# EAGLE board Board (EAGLE 9.7.0)
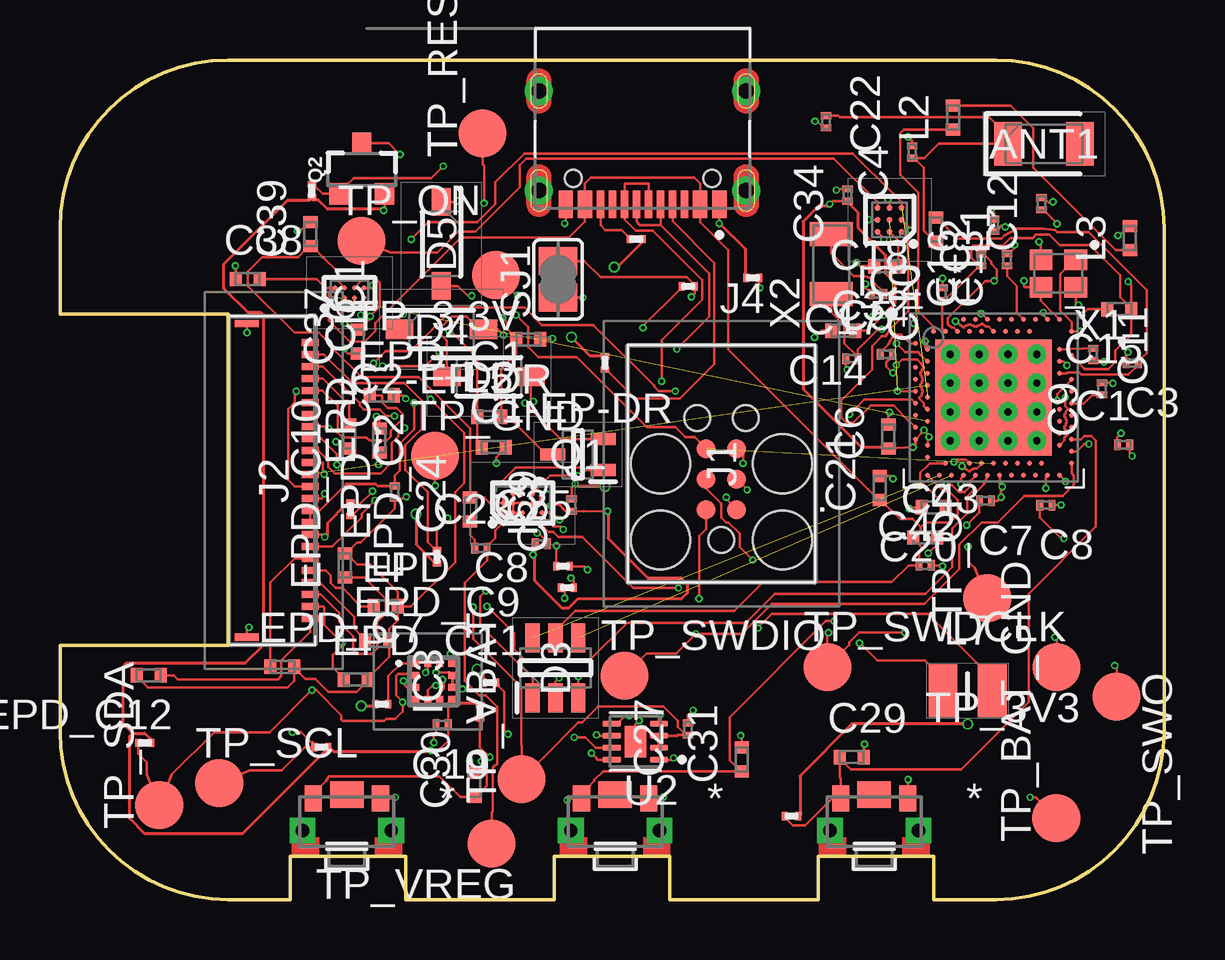
[diagram p0: board, top side]
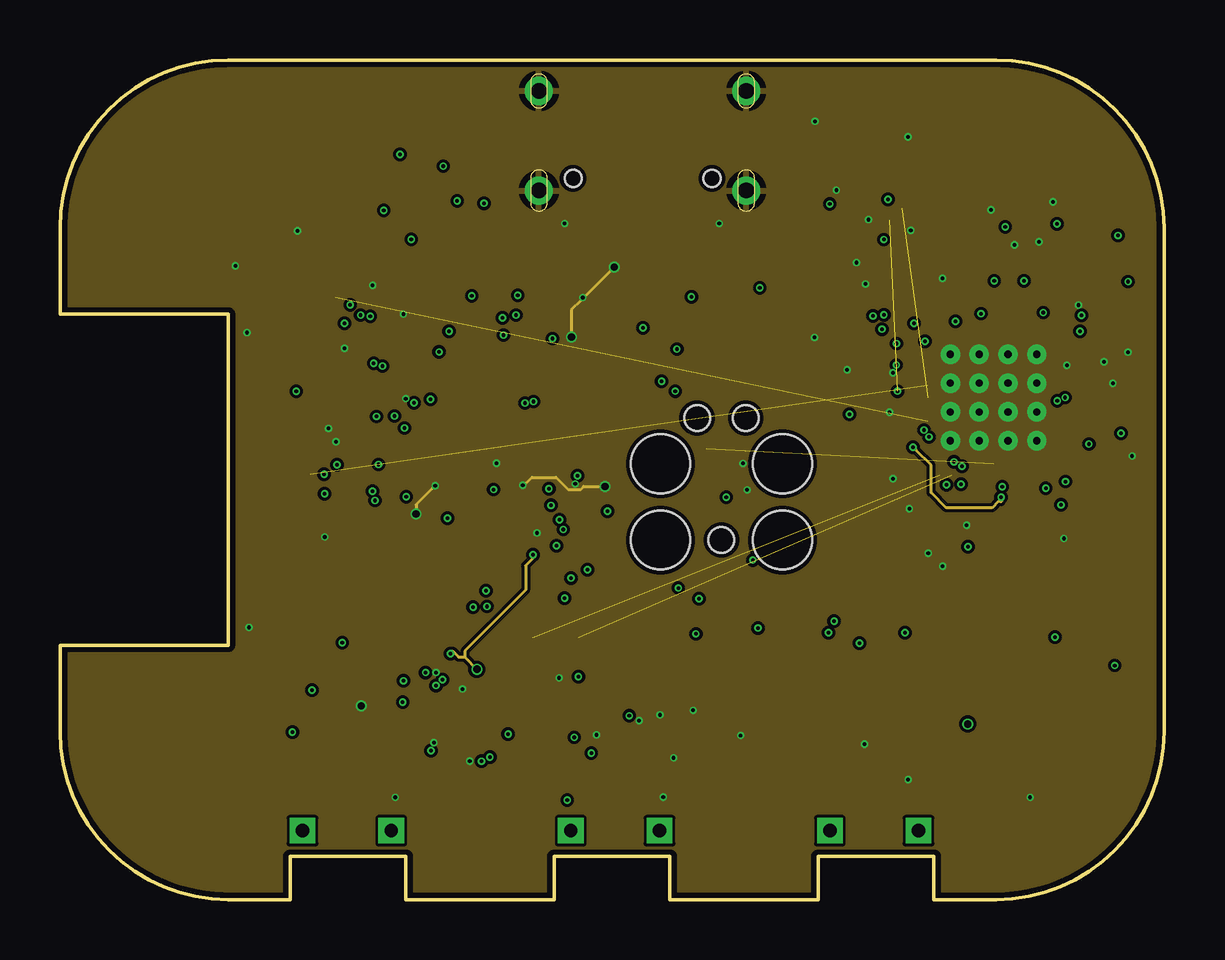
[diagram p1: board, inner layer Route2]
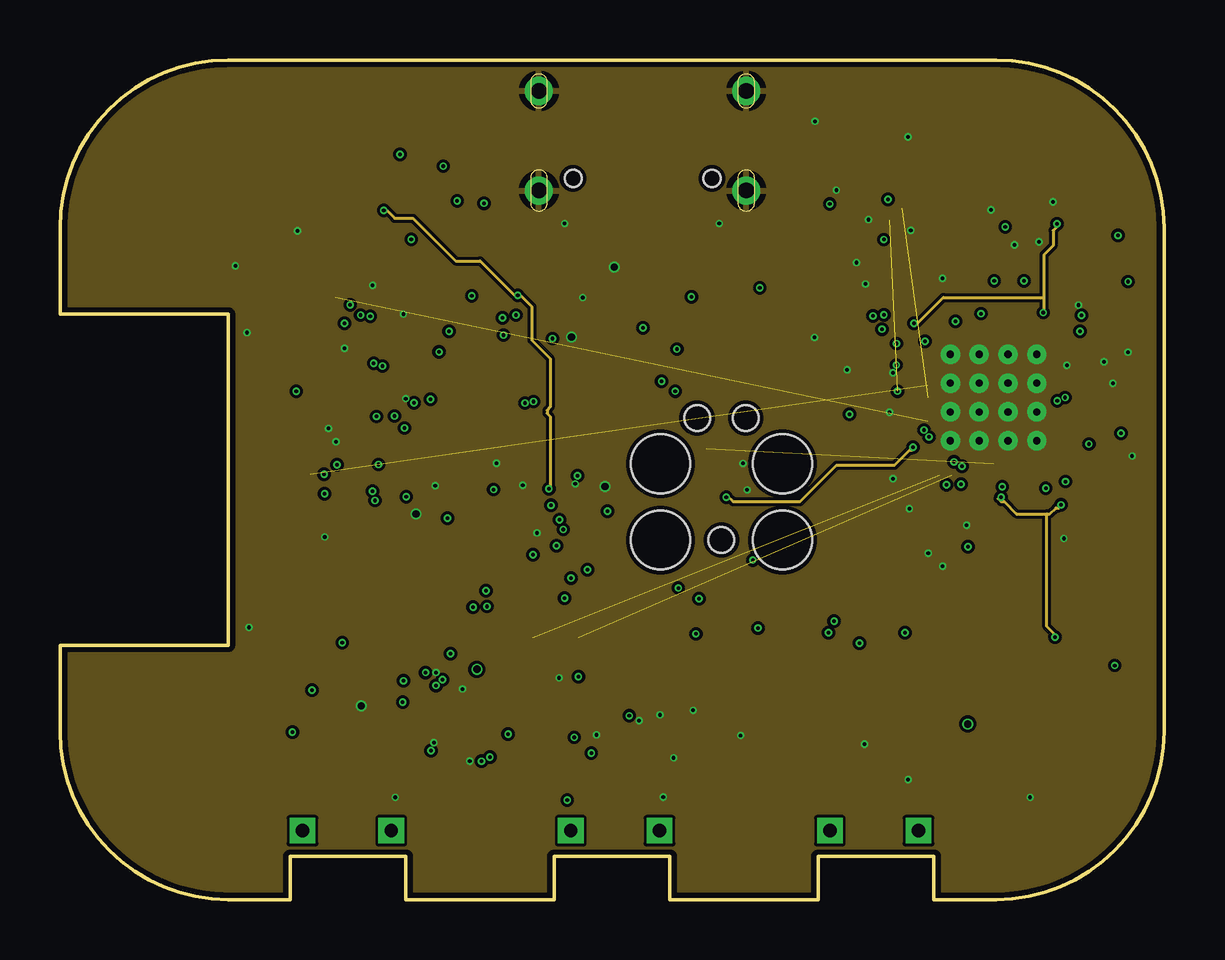
[diagram p2: board, inner layer Route15]
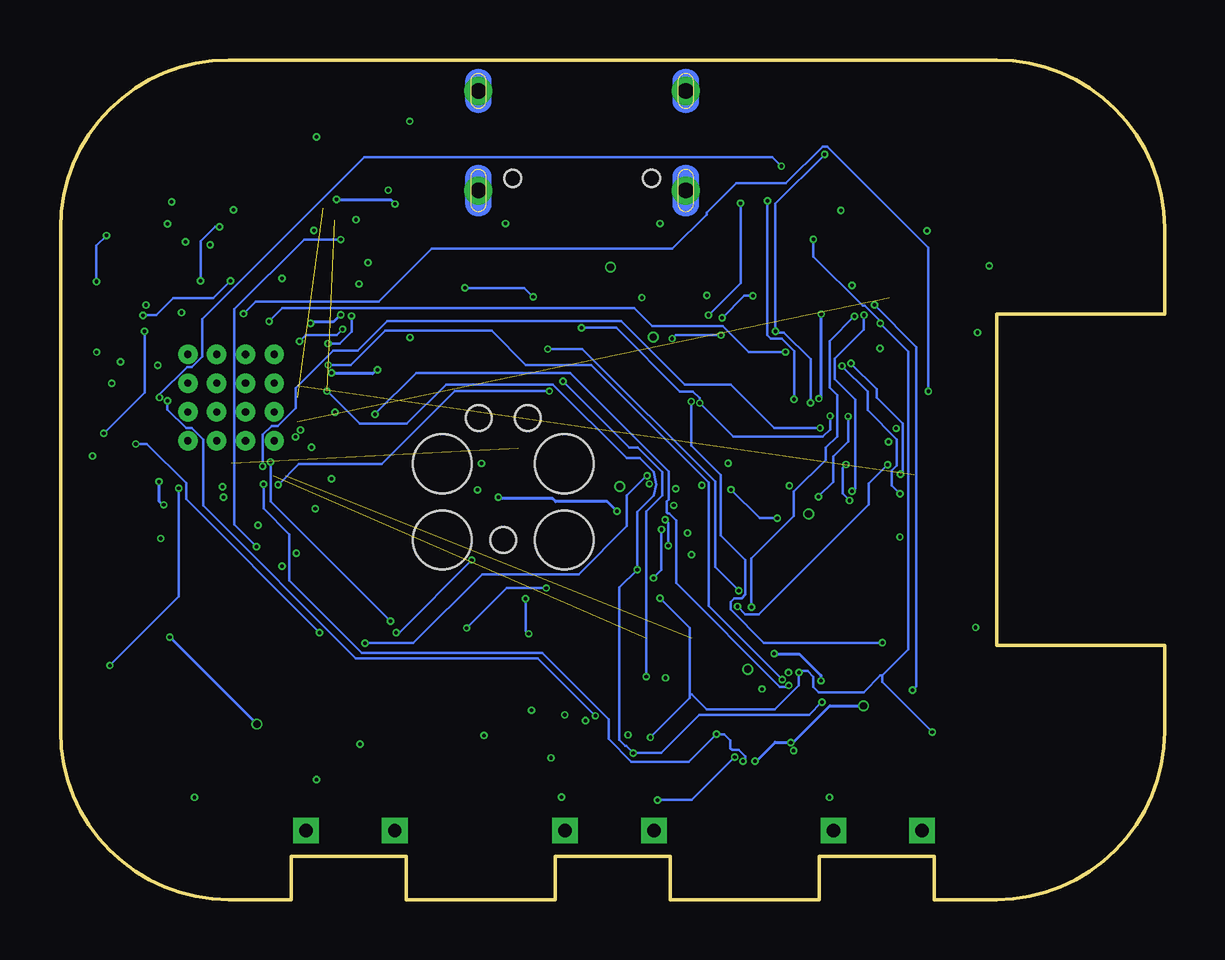
[diagram p3: board, bottom side, seen from below]

Size 46 x 35 mm. Coordinates in mm from the lower left corner, seen from the top.
Outline: 0,28 0,24.4 7,24.4 7,10.6 0,10.6 0,7 arc90 7,0 9.6,0 9.6,1.8 14.4,1.8 14.4,0 20.6,0 20.6,1.8 25.4,1.8 25.4,0 31.6,0 31.6,1.8 36.4,1.8 36.4,0 39,0 arc90 46,7 46,28 arc90 39,35 7,35 arc90 0,28
Copper layers (1+2*15+16): Top 0.035mm / dielectric 1.6mm / Route2 0.035mm / dielectric 0.15mm / Route15 0.035mm / dielectric 0.2mm / Bottom 0.035mm
Design rules "jlcpcb-2layers.dru *": minimum track width 5mil, minimum drill 0.2mm, track to track 5mil, track to pad 5mil, pad to pad 5mil, via to via 5mil, smd to smd 5mil, copper to edge 0.2mm, drill to drill 6mil, minimum pad ring 10mil, minimum via ring 3mil, stop-mask expansion 4mil, vias tented up to drill 999mm, thermal gap 10mil

## Footprints (pad centres in the part's own frame; a part is rotated, then mirrored left to right if it is on the bottom)
2450AT18B100E_ANTC3216X140N = smd 1.15 x 1.8: 1 -1.5,0; 2 1.5,0
NORDIC_NRF_3_RESC0201_L = smd 0.28 x 0.43: 1 -0.255,0; 2 0.255,0
NORDIC_NRF_3_RESC0402_L = smd 0.5 x 0.6: 1 -0.5,0; 2 0.5,0
ESP32_C6_LIBRARY_5_SOD3716X135N = smd 1.15 x 0.8: 1 -1.75,0; 2 1.75,0
ESP32_C6_LIBRARY_3_SOT95P280X145-6N = smd 1.2 x 0.6: 1 -1.25,0.95; 2 -1.25,0; 3 -1.25,-0.95; 4 1.25,-0.95; 5 1.25,0; 6 1.25,0.95
BQ25180YBGR_BGA8C40P2X4_100X155X50 = smd 0.2 x 0.2: A1 -0.2,0.6; A2 0.2,0.6; B1 -0.2,0.2; B2 0.2,0.2; C1 -0.2,-0.2; C2 0.2,-0.2; D1 -0.2,-0.6; D2 0.2,-0.6
DRV2605YZFR_BGA9C50P3X3_144X144X62 = smd 0.25 x 0.25: A1 -0.5,0.5; A2 0,0.5; A3 0.5,0.5; B1 -0.5,0; B2 0,0; B3 0.5,0; C1 -0.5,-0.5; C2 0,-0.5; C3 0.5,-0.5
BMA423_BMA423 = smd 0.3 x 0.35: 1 -0.75,-0.775; 2 -0.25,-0.775; 3 0.25,-0.775; 4 0.75,-0.775; 7 0.75,0.775; 8 0.25,0.775; 9 -0.25,0.775; 10 -0.75,0.775 | smd 0.35 x 0.3: 5 0.775,-0.25; 6 0.775,0.25; 11 -0.775,0.25; 12 -0.775,-0.25
RT6160AWSC_BGA15C40P3X5_140X230X60 = smd 0.216 x 0.216: A1 -0.4,0.8; A2 0,0.8; A3 0.4,0.8; B1 -0.4,0.4; B2 0,0.4; B3 0.4,0.4; C1 -0.4,0; C2 0,0; C3 0.4,0; D1 -0.4,-0.4; D2 0,-0.4; D3 0.4,-0.4; E1 -0.4,-0.8; E2 0,-0.8; E3 0.4,-0.8
TC2030-IDC_TC2030IDC = smd 0.783 x 0.783: 1 -0.953,-0.635; 2 -0.953,0.635; 3 0.317,-0.635; 4 0.317,0.635; 5 1.588,-0.635; 6 1.588,0.635 | hole 2.451: -2.223,-2.54; -2.223,2.54; 0.952,-2.54; 0.952,2.54 | hole 1.067: -2.223,0; 2.857,-1.016; 2.857,1.016
503480-2400_5034802400 = smd 0.3 x 0.7: 1 -5.75,1.525; 2 -5.25,1.525; 3 -4.75,1.525; 4 -4.25,1.525; 5 -3.75,1.525; 6 -3.25,1.525; 7 -2.75,1.525; 8 -2.25,1.525; 9 -1.75,1.525; 10 -1.25,1.525; 11 -0.75,1.525; 12 -0.25,1.525; 13 0.25,1.525; 14 0.75,1.525; 15 1.25,1.525; 16 1.75,1.525; 17 2.25,1.525; 18 2.75,1.525; 19 3.25,1.525; 20 3.75,1.525; 21 4.25,1.525; 22 4.75,1.525; 23 5.25,1.525; 24 5.75,1.525 | smd 0.3 x 1: MP1 -6.54,-1.125; MP2 6.54,-1.125
KH-TYPE-C-16P_KINGHELM_KH-TYPE-C-16P = smd 0.6 x 1.15: A1_B12 -3.2,4.725; A4_B9 -2.4,4.725; A9_B4 2.4,4.725; A12_B1 3.2,4.725 | smd 0.3 x 1.15: A5 -1.25,4.725; A6 -0.25,4.725; A7 0.25,4.725; A8 1.25,4.725; B5 1.75,4.725; B6 0.75,4.725; B7 -0.75,4.725; B8 -1.75,4.725 | drill 0.65 pad 1.05: SH1 -4.32,0; SH2 4.32,0; SH3 -4.32,4.15; SH4 4.32,4.15 | hole 0.7: -2.89,3.65; 2.89,3.65
NORDIC_NRF_2_RESC0402_L = smd 0.5 x 0.6: 1 -0.5,0; 2 0.5,0
MLP2016SR47MT0S1_INDC2016X100N = smd 1.2 x 2.2: 1 -1.028,0; 2 1.028,0
ESP32_C6_LIBRARY_6_SOT65P210X110-3N = smd 1.05 x 0.5: 1 -1.05,0.65; 2 -1.05,-0.65; 3 1.05,0
ESP32_C6_LIBRARY_4_ESP32_C6_LIBRARY_4_ESP32_C6_LIBRARY_4_ESP32_C6_LIBRARY_4_ESP32_WROVER_SPARKFUN-DISCRETESEMI_SOT23-3 = smd 0.8 x 0.9: 1 -0.95,-1; 2 0.95,-1; 3 0,1.1
CPF0201D7K68C1_0201 = smd 0.35 x 0.25: 1 0,0.275; 2 0,-0.275
ESP32_C6_LIBRARY_7_JUMPER_SJ = smd 1.168 x 1.6: 1 -0.762,0; 2 0.762,0
2025-10-22_07-23-44_LIBRARY_SW_EVP-AKE31A_PAN = smd 0.711 x 1.092: 1 -1.4,-0.972; 2 1.4,-0.972 | drill 0.559 pad 0.914 square: 3 -1.848,0.381; 4 1.848,0.381 | smd 1.397 x 1.092: 5 0,-1.124
HECTOR_WATCH_1_TP20R = smd 2 x 2: TP 0,0
NORDIC_NRF_4_AQFN50P700X700X85_HS-74N = smd 4.85 x 4.85: P$74 0,0 | drill 0.3 pad 0.6: P$75 -1.8,1.8; P$76 -0.6,1.8; P$77 0.6,1.8; P$78 1.8,1.8; P$79 -1.8,0.6; P$80 -0.6,0.6; P$81 0.6,0.6; P$82 1.8,0.6; P$83 -1.8,-0.6; P$84 -0.6,-0.6; P$85 0.6,-0.6; P$86 1.8,-0.6; P$87 -1.8,-1.8; P$88 -0.6,-1.8; P$89 0.6,-1.8; P$90 1.8,-1.8 | smd 0.2 x 0.2: P$A8 -1.25,3.25; P$A10 -0.75,3.25; P$A12 -0.25,3.25; P$A14 0.25,3.25; P$A16 0.75,3.25; P$A18 1.25,3.25; P$A20 1.75,3.25; P$A22 2.25,3.25; P$A23 2.75,3.25; P$AA24 3.25,-2.25; P$AB2 -2.75,-2.5; P$AC5 -2,-2.75; P$AC9 -1,-2.75; P$AC11 -0.5,-2.75; P$AC13 0,-2.75; P$AC15 0.5,-2.75; P$AC17 1,-2.75; P$AC19 1.5,-2.75; P$AC21 2,-2.75; P$AC24 3.25,-2.75; P$AD2 -2.75,-3.25; P$AD4 -2.25,-3.25; P$AD6 -1.75,-3.25; P$AD8 -1.25,-3.25; P$AD10 -0.75,-3.25; P$AD12 -0.25,-3.25; P$AD14 0.25,-3.25; P$AD16 0.75,-3.25; P$AD18 1.25,-3.25; P$AD20 1.75,-3.25; P$AD22 2.25,-3.25; P$AD23 2.75,-3.25; P$B1 -3.25,2.75; P$B3 -2.5,2.75; P$B5 -2,2.75; P$B7 -1.5,2.75; P$B9 -1,2.75; P$B11 -0.5,2.75; P$B13 0,2.75; P$B15 0.5,2.75; P$B17 1,2.75; P$B19 1.5,2.75; P$B24 3.25,2.75; P$C1 -3.25,2.25; P$D2 -2.75,2; P$D23 2.75,2; P$E24 3.25,1.75; P$F2 -2.75,1.5; P$F23 2.75,1.5; P$G1 -3.25,1.25; P$H2 -2.75,1; P$H23 2.75,1; P$J1 -3.25,0.75; P$J24 3.25,0.75; P$K2 -2.75,0.5; P$L1 -3.25,0.25; P$L24 3.25,0.25; P$M2 -2.75,0; P$N1 -3.25,-0.25; P$N24 3.25,-0.25; P$P2 -2.75,-0.5; P$P23 2.75,-0.5; P$R1 -3.25,-0.75; P$R24 3.25,-0.75; P$T2 -2.75,-1; P$T23 2.75,-1; P$U1 -3.25,-1.25; P$U24 3.25,-1.25; P$V23 2.75,-1.5; P$W1 -3.25,-1.75; P$W24 3.25,-1.75; P$Y2 -2.75,-2; P$Y23 2.75,-2
ESP32_C6_LIBRARY_SON50P200X200X80-9N = smd 0.76 x 0.27: 1 -0.985,0.75; 2 -0.985,0.25; 3 -0.985,-0.25; 4 -0.985,-0.75; 5 0.985,-0.75; 6 0.985,-0.25; 7 0.985,0.25; 8 0.985,0.75 | smd 0.9 x 1.3: 9 0,0
NORDIC_NRF_BT-XTAL_2016_N = smd 0.95 x 0.85: 1 -0.725,-0.575; 2 0.725,-0.575; 3 0.725,0.575; 4 -0.725,0.575
NORDIC_NRF_1_XTAL_3215_N = smd 1 x 1.8: 1 -1.25,0; 2 1.25,0

## Placement (x,y rotation side)
ANT1  2450AT18B100E  [2450AT18B100E_ANTC3216X140N]  41,31.5 0 top
C1  12pF  [NORDIC_NRF_3_RESC0201_L]  44.31,18.96 0 top
C1-EP-DR  10uF  [NORDIC_NRF_3_RESC0402_L]  18.07,18.86 0 top
C2  12pF  [NORDIC_NRF_3_RESC0201_L]  38.92,28.11 90 top
C2-EP-DR  4.7uF/25V  [NORDIC_NRF_3_RESC0402_L]  19.51,23.35 180 top
C3  1pF  [NORDIC_NRF_3_RESC0201_L]  44.67,22.37 180 top
C4  1pF  [NORDIC_NRF_3_RESC0201_L]  35.51,31.16 90 top
C5  100nF  [NORDIC_NRF_3_RESC0201_L]  34.43,22.73 0 top
C6  4.7uF  [NORDIC_NRF_3_RESC0402_L]  34.52,19.31 90 top
C7  100nF  [NORDIC_NRF_3_RESC0201_L]  38.56,16.62 180 top
C8  100nF  [NORDIC_NRF_3_RESC0201_L]  41.08,16.44 180 top
C9  820pF  [NORDIC_NRF_3_RESC0201_L]  43.41,21.29 90 top
C10  N.C.  [NORDIC_NRF_3_RESC0201_L]  36.77,25.24 90 top
C11  100pF  [NORDIC_NRF_3_RESC0201_L]  43.06,22.73 270 top
C12  100nF  [NORDIC_NRF_3_RESC0201_L]  40.9,29.01 90 top
C13  N.C.  [NORDIC_NRF_3_RESC0201_L]  39.46,26.68 90 top
C14  4.7uF  [NORDIC_NRF_3_RESC0402_L]  32.63,23.71 180 top
C15  1.0uF  [NORDIC_NRF_3_RESC0402_L]  44.13,24.61 180 top
C16  47nF  [NORDIC_NRF_3_RESC0201_L]  38.38,26.68 90 top
C17  12pF  [NORDIC_NRF_3_RESC0201_L]  32.99,22.55 0 top
C18  12pF  [NORDIC_NRF_3_RESC0201_L]  34.07,25.24 0 top
C19  100nF  [NORDIC_NRF_3_RESC0201_L]  15.92,7.29 180 top
C20  4.7uF  [NORDIC_NRF_3_RESC0402_L]  36.4,16.35 180 top
C21  4.7uF  [NORDIC_NRF_3_RESC0402_L]  34.16,17.16 90 top
C22  N.C.  [NORDIC_NRF_3_RESC0201_L]  31.91,32.42 270 top
C23  0.1uF  [NORDIC_NRF_3_RESC0201_L]  17.54,14.65 0 top
C24  10uF  [NORDIC_NRF_3_RESC0402_L]  17.09,16.26 90 top
C25  22uF  [NORDIC_NRF_3_RESC0201_L]  20.06,14.83 0 top
C27  0.1uF  [NORDIC_NRF_3_RESC0201_L]  26.16,7.11 90 top
C29  1uF  [NORDIC_NRF_3_RESC0402_L]  32.99,5.94 0 top
C30  1uF  [NORDIC_NRF_3_RESC0402_L]  17.27,4.77 90 top
C31  1uF  [NORDIC_NRF_3_RESC0402_L]  28.41,5.85 90 top
C32  1uF  [NORDIC_NRF_3_RESC0402_L]  34.43,26.4 180 top
C33  22uF  [NORDIC_NRF_3_RESC0201_L]  21.31,16.44 90 top
C34  0.1uF  [NORDIC_NRF_3_RESC0201_L]  32.81,29.37 90 top
C37  1uF  [NORDIC_NRF_3_RESC0402_L]  12.41,23.26 90 top
C38  1uF  [NORDIC_NRF_3_RESC0402_L]  7.83,25.86 0 top
C39  10uF  [NORDIC_NRF_3_RESC0402_L]  10.44,27.75 90 top
C42  0.1uF  [NORDIC_NRF_3_RESC0201_L]  36.05,13.93 0 top
C43  4.7uF  [NORDIC_NRF_3_RESC0402_L]  36.04,15.09 0 top
D2  MBR0530  [ESP32_C6_LIBRARY_5_SOD3716X135N]  17.87,21.8 0 top
D3  USBLC6-2SC6Y  [ESP32_C6_LIBRARY_3_SOT95P280X145-6N]  20.64,9.66 90 top
D4  MBR0530  [ESP32_C6_LIBRARY_5_SOD3716X135N]  15.89,23.77 0 top
D5  MBR0530  [ESP32_C6_LIBRARY_5_SOD3716X135N]  15.89,27.33 270 top
EPD_C1  1uF/50V  [NORDIC_NRF_3_RESC0402_L]  13.4,21.02 0 top
EPD_C2  1uF/50V  [NORDIC_NRF_3_RESC0402_L]  12.05,19.31 270 top
EPD_C5  0.1uF/50V  [NORDIC_NRF_3_RESC0201_L]  13.95,16.98 90 top
EPD_C6  1uF/50V  [NORDIC_NRF_3_RESC0402_L]  13.31,19.13 90 top
EPD_C7  1uF/50V  [NORDIC_NRF_3_RESC0402_L]  9.27,9.71 0 top
EPD_C8  1uF/50V  [NORDIC_NRF_3_RESC0402_L]  13.58,12.22 0 top
EPD_C9  1uF/50V  [NORDIC_NRF_3_RESC0402_L]  13.22,10.79 0 top
EPD_C10  1uF/50V  [NORDIC_NRF_3_RESC0402_L]  11.87,13.93 90 top
EPD_C11  1uF/50V  [NORDIC_NRF_3_RESC0402_L]  12.32,9.17 0 top
EPD_C12  1uF/50V  [NORDIC_NRF_3_RESC0402_L]  3.7,9.35 180 top
IC1  BQ25180YBGR  [BQ25180YBGR_BGA8C40P2X4_100X155X50]  12.06,25.29 90 top
IC2  DRV2605YZFR  [DRV2605YZFR_BGA9C50P3X3_144X144X62]  34.57,28.33 180 top
IC3  BMA421  [BMA423_BMA423]  15.57,9.1 270 top
IC9  RT6160AWSC  [RT6160AWSC_BGA15C40P3X5_140X230X60]  19.28,16.53 90 top
J1  TC2030-IDC  [TC2030-IDC_TC2030IDC]  27.56,17.21 90 top
J2  503480-2400  [503480-2400_5034802400]  8.9,17.47 270 top
J4  KH-TYPE-C-16P  [KH-TYPE-C-16P_KINGHELM_KH-TYPE-C-16P]  24.27,33.71 180 top
L1  3.9nH  [NORDIC_NRF_2_RESC0402_L]  36.49,27.93 270 top
L2  10uH  [NORDIC_NRF_2_RESC0402_L]  37.21,32.6 90 top
L3  15nH  [NORDIC_NRF_2_RESC0402_L]  44.58,27.57 90 top
L5  68uH  [NORDIC_NRF_2_RESC0402_L]  17.89,20.12 0 top
L7  FTC252012SR47MBCA  [MLP2016SR47MT0S1_INDC2016X100N]  37.82,8.71 180 top
Q1  SI1308EDL-T1-GE3  [ESP32_C6_LIBRARY_6_SOT65P210X110-3N]  21.58,18.56 180 top
Q2  20V/4.2A/52mΩ/1.4W  [ESP32_C6_LIBRARY_4_ESP32_C6_LIBRARY_4_ESP32_C6_LIBRARY_4_ESP32_C6_LIBRARY_4_ESP32_WROVER_SPARKFUN-DISCRETESEMI_SOT23-3]  12.57,30.42 0 top
R1  0  [CPF0201D7K68C1_0201]  13.41,8.15 90 top
R1_EP_DR  0.47  [CPF0201D7K68C1_0201]  26.17,25.56 270 top
R1_USB  5K1  [CPF0201D7K68C1_0201]  22.71,22.38 0 top
R2  0  [CPF0201D7K68C1_0201]  20.96,13.89 270 top
R2_EP_DR  10K  [CPF0201D7K68C1_0201]  15.7,14.29 180 top
R2_USB  5K1  [CPF0201D7K68C1_0201]  24.01,27.53 90 top
R4  0  [CPF0201D7K68C1_0201]  21.14,12.99 90 top
R5  10K  [CPF0201D7K68C1_0201]  17.91,9.04 270 top
R7  10K  [CPF0201D7K68C1_0201]  30.48,3.48 90 top
R8  10K  [CPF0201D7K68C1_0201]  17.5,7.83 180 top
R9  10K  [CPF0201D7K68C1_0201]  12.11,16.27 0 top
R17  3K3  [CPF0201D7K68C1_0201]  10.9,6.35 270 top
R18  3K3  [CPF0201D7K68C1_0201]  3.53,6.53 270 top
R_PWR_EPD  10K  [CPF0201D7K68C1_0201]  10.49,29.55 0 top
R_TYPE_SEL  2.2  [CPF0201D7K68C1_0201]  28.86,25.92 90 top
SJ1  [ESP32_C6_LIBRARY_7_JUMPER_SJ]  20.75,25.85 90 top
SW1  2025-10-22_07-23-44_LIBRARY_EVP-AKE31ASW_EVP-AKE31A_PAN  [2025-10-22_07-23-44_LIBRARY_SW_EVP-AKE31A_PAN]  11.95,3.25 180 top
SW2  2025-10-22_07-23-44_LIBRARY_EVP-AKE31ASW_EVP-AKE31A_PAN  [2025-10-22_07-23-44_LIBRARY_SW_EVP-AKE31A_PAN]  23.13,3.25 180 top
SW3  2025-10-22_07-23-44_LIBRARY_EVP-AKE31ASW_EVP-AKE31A_PAN  [2025-10-22_07-23-44_LIBRARY_SW_EVP-AKE31A_PAN]  33.92,3.25 180 top
TP_3.3V  HECTOR_WATCH_1_TPTP20R  [HECTOR_WATCH_1_TP20R]  18.17,26.03 180 top
TP_3V3  HECTOR_WATCH_1_TPTP20R  [HECTOR_WATCH_1_TP20R]  41.53,9.7 180 top
TP_BAT_GND  HECTOR_WATCH_1_TPTP20R  [HECTOR_WATCH_1_TP20R]  41.51,3.4 90 top
TP_GND  HECTOR_WATCH_1_TPTP20R  [HECTOR_WATCH_1_TP20R]  15.62,18.49 0 top
TP_ON  HECTOR_WATCH_1_TPTP20R  [HECTOR_WATCH_1_TP20R]  12.57,27.47 0 top
TP_OP  HECTOR_WATCH_1_TPTP20R  [HECTOR_WATCH_1_TP20R]  38.64,12.55 90 top
TP_RESET  HECTOR_WATCH_1_TPTP20R  [HECTOR_WATCH_1_TP20R]  17.61,31.94 90 top
TP_SCL  HECTOR_WATCH_1_TPTP20R  [HECTOR_WATCH_1_TP20R]  6.64,4.85 0 top
TP_SDA  HECTOR_WATCH_1_TPTP20R  [HECTOR_WATCH_1_TP20R]  4.14,3.94 90 top
TP_SWDCLK  HECTOR_WATCH_1_TPTP20R  [HECTOR_WATCH_1_TP20R]  31.97,9.7 0 top
TP_SWDIO  HECTOR_WATCH_1_TPTP20R  [HECTOR_WATCH_1_TP20R]  23.53,9.34 0 top
TP_SWO  HECTOR_WATCH_1_TPTP20R  [HECTOR_WATCH_1_TP20R]  44.03,8.45 270 top
TP_VBAT  HECTOR_WATCH_1_TPTP20R  [HECTOR_WATCH_1_TP20R]  19.23,5.01 90 top
TP_VREG  HECTOR_WATCH_1_TPTP20R  [HECTOR_WATCH_1_TP20R]  17.99,2.34 180 top
U1  NRF52840 _QF  [NORDIC_NRF_4_AQFN50P700X700X85_HS-74N]  38.9,20.93 0 top
U2  MAX17048G+T10  [ESP32_C6_LIBRARY_SON50P200X200X80-9N]  23.97,6.58 180 top
X1  32MHz  [NORDIC_NRF_BT-XTAL_2016_N]  41.6,26.1 180 top
X2  32.768kHz  [NORDIC_NRF_1_XTAL_3215_N]  32.13,26.49 90 top

## Library data of the parts
ANT1 = InkTime_v5; ARROW_PART_NUMBER: 2450AT18B100E; ARROW_PRICE-STOCK: https://www.arrow.com/en/products/2450at18b100e/johanson-dielectrics?utm_currency=USD&region=nac; DESCRIPTION: Antennas 2.45GHz ANTENNA; HEIGHT: 1.4mm; MANUFACTURER_NAME: JOHANSON TECHNOLOGY; MANUFACTURER_PART_NUMBER: 2450AT18B100E; MOUSER_PART_NUMBER: 609-2450AT18B100E; MOUSER_PRICE-STOCK: https://www.mouser.co.uk/ProductDetail/Johanson-Technology/2450AT18B100E?qs=yCnrNFeXz%252Bh5MFsFIXGZGA%3D%3D
C1 C1-EP-DR C2 C2-EP-DR C3-C25 C27 C29-C34 C37-C39 C42 C43 EPD_C1 EPD_C2 EPD_C5-EPD_C12 L1-L3 L5 R1 R1_EP_DR R1_USB R2 R2_EP_DR R2_USB R4 R5 R7-R9 R17 R18 R_PWR_EPD R_TYPE_SEL SJ1 TP_3.3V TP_3V3 TP_BAT_GND TP_GND TP_ON TP_OP TP_RESET TP_SCL TP_SDA TP_SWDCLK TP_SWDIO TP_SWO TP_VBAT TP_VREG U1 X1 X2 = InkTime_v5
D2 D4 D5 = InkTime_v5; AVAILABILITY: In Stock; CHECK_PRICES: https://www.snapeda.com/parts/MBR0530/Onsemi/view-part/?ref=eda; DESCRIPTION: Diode Schottky 30 V 500mA Surface Mount SOD-123; MF: ON Semiconductor; MP: MBR0530; PACKAGE: SOD-123-2 ON Semiconductor; PRICE: None; PURCHASE-URL: https://www.snapeda.com/api/url_track_click_mouser/?unipart_id=179458&manufacturer=ON Semiconductor&part_name=MBR0530&search_term=None; SNAPEDA_LINK: https://www.snapeda.com/parts/MBR0530/Onsemi/view-part/?ref=snap
D3 = InkTime_v5; AVAILABILITY: In Stock; CHECK_PRICES: https://www.snapeda.com/parts/USBLC6-2SC6Y/STMicroelectronics/view-part/?ref=eda; DESCRIPTION: 17V Clamp 5A (8/20µs) Ipp Tvs Diode Surface Mount SOT-23-6; MF: STMicroelectronics; MP: USBLC6-2SC6Y; PACKAGE: SOT-23-6 STMicroelectronics; PRICE: None; SNAPEDA_LINK: https://www.snapeda.com/parts/USBLC6-2SC6Y/STMicroelectronics/view-part/?ref=snap
IC1 = InkTime_v5; ARROW_PART_NUMBER: BQ25180YBGR; ARROW_PRICE-STOCK: https://www.arrow.com/en/products/bq25180ybgr/texas-instruments?utm_currency=USD&region=nac; DESCRIPTION: Charger IC Lithium Ion/Polymer, Lithium Iron Phosphate 8-DSBGA (1.6x1.1); HEIGHT: 0.5mm; MANUFACTURER_NAME: Texas Instruments; MANUFACTURER_PART_NUMBER: BQ25180YBGR; MOUSER_PART_NUMBER: 595-BQ25180YBGR; MOUSER_PRICE-STOCK: https://www.mouser.co.uk/ProductDetail/Texas-Instruments/BQ25180YBGR?qs=doiCPypUmgEWjAK%252BJAX6Tw%3D%3D
IC2 = InkTime_v5; ARROW_PART_NUMBER: DRV2605YZFR; ARROW_PRICE-STOCK: https://www.arrow.com/en/products/drv2605yzfr/texas-instruments?region=nac; DESCRIPTION: Haptic Driver for ERM/LRA with Built-In Library and Smart Loop Architecture; HEIGHT: 0.625mm; MANUFACTURER_NAME: Texas Instruments; MANUFACTURER_PART_NUMBER: DRV2605YZFR
IC3 = InkTime_v5; ARROW_PART_NUMBER: BMA423; ARROW_PRICE-STOCK: https://www.arrow.com/en/products/bma423/bosch; DESCRIPTION: Accelerometers Triaxial low-g 12bit Acceleration Sensor; HEIGHT: 1mm; MANUFACTURER_NAME: BOSCH; MANUFACTURER_PART_NUMBER: BMA423; MOUSER_PART_NUMBER: 262-BMA423; MOUSER_PRICE-STOCK: https://www.mouser.co.uk/ProductDetail/Bosch-Sensortec/BMA423?qs=HXFqYaX1Q2xC%252BSgeGoX3mg%3D%3D
IC9 = InkTime_v5; DESCRIPTION: Buck-Boost Regulator Positive Output Step-Up/Step-Down I2C DC-DC Controller IC 15-WL-CSP (BSC) (1.4x2.3); HEIGHT: 0.6mm; MANUFACTURER_NAME: RICHTEK; MANUFACTURER_PART_NUMBER: RT6160AWSC; MOUSER_PART_NUMBER: 835-RT6160AWSC; MOUSER_PRICE-STOCK: https://www.mouser.co.uk/ProductDetail/Richtek/RT6160AWSC?qs=amGC7iS6iy%2FLd9PSoixZXQ%3D%3D
J1 = InkTime_v5; DESCRIPTION: CABLE ADAPTER 6 POS; HEIGHT: 19mm; MANUFACTURER_NAME: Tag Connect; MANUFACTURER_PART_NUMBER: TC2030-IDC
J2 = InkTime_v5; DESCRIPTION: FFC & FPC Connectors 0.5mm FPC RA SMT Dual Contact 24Ckt; HEIGHT: 1.87mm; MANUFACTURER_NAME: Molex; MANUFACTURER_PART_NUMBER: 503480-2400; MOUSER_PART_NUMBER: 538-503480-2400; MOUSER_PRICE-STOCK: https://www.mouser.co.uk/ProductDetail/Molex/503480-2400?qs=OAhjpuo3Vu7efIoxFh9AOw%3D%3D
J4 = InkTime_v5; AVAILABILITY: Not in stock; CHECK_PRICES: https://www.snapeda.com/parts/KH-TYPE-C-16P/Kinghelm/view-part/?ref=eda; MF: kinghelm; MP: KH-TYPE-C-16P; PACKAGE: None; PRICE: None; SNAPEDA_LINK: https://www.snapeda.com/parts/KH-TYPE-C-16P/Kinghelm/view-part/?ref=snap
L7 = InkTime_v5; DESCRIPTION: SMD / SMT Inductors (Coils), L=0.47?H, L x W x T :; HEIGHT: 1mm; JLCPCB: https://jlcpcb.com/partdetail/6763488-FTC252012SR47MBCA/C5832368; MANUFACTURER_NAME: TDK; MANUFACTURER_PART_NUMBER: FTC252012SR47MBCA
Q1 = InkTime_v5; AVAILABILITY: In Stock; CHECK_PRICES: https://www.snapeda.com/parts/SI1308EDL-T1-GE3/Vishay+Siliconix/view-part/?ref=eda; DESCRIPTION: Si1308EDL-T1-GE3 N-channel MOSFET Transistor, 1.5 A, 30 V, 3-Pin SC-70 | Siliconix / Vishay SI1308EDL-T1-GE3; MF: Vishay Siliconix; MP: SI1308EDL-T1-GE3; PACKAGE: SOT-323 Vishay Semiconductor; PRICE: None; PURCHASE-URL: https://www.snapeda.com/api/url_track_click_mouser/?unipart_id=274603&manufacturer=Vishay Siliconix&part_name=SI1308EDL-T1-GE3&search_term=None; SNAPEDA_LINK: https://www.snapeda.com/parts/SI1308EDL-T1-GE3/Vishay+Siliconix/view-part/?ref=snap
Q2 = InkTime_v5; PROD_ID: TRAN-14388
SW1-SW3 = InkTime_v5; COPYRIGHT: Copyright (C) 2025 Ultra Librarian. All rights reserved.; DIGI-KEY_PART_NUMBER_1: P123437TR-ND; DIGI-KEY_PART_NUMBER_2: P123437CT-ND; DIGI-KEY_PART_NUMBER_3: P123437DKR-ND; MANUFACTURER_NAME: Panasonic; MANUFACTURER_PART_NUMBER: EVP-AKE31A
U2 = InkTime_v5; AVAILABILITY: In Stock; CHECK_PRICES: https://www.snapeda.com/parts/MAX17048G+T10/Analog+Devices/view-part/?ref=eda; DESCRIPTION: 3µA 1-Cell/2-Cell Fuel Gauge with ModelGauge; MF: Analog Devices; MP: MAX17048G+T10; PACKAGE: TDFN-8 Maxim; PRICE: None; PURCHASE-URL: https://www.snapeda.com/api/url_track_click_mouser/?unipart_id=329239&manufacturer=Analog Devices&part_name=MAX17048G+T10&search_term=None; SNAPEDA_LINK: https://www.snapeda.com/parts/MAX17048G+T10/Analog+Devices/view-part/?ref=snap

## Nets
3V3: C6.1 C7.1 C8.1 C12.1 C14.1 C19.1 C25.1 C33.1 C34.1 IC2.C2 IC3.3 IC3.7 IC3.10 IC9.E2 IC9.E3 J1.1 Q2.2 R5.2 R7.2 R8.2 R17.1 R18.1 R_PWR_EPD.2 TP_3.3V.TP TP_3V3.TP U1.P$A22 U1.P$AD14 U1.P$AD23 U1.P$B1 U1.P$W1 U1.P$Y2
ALERT: U1.P$J24 U2.5
D+: D3.4 U1.P$AD6
D-: D3.6 U1.P$AD4
DN: D3.1 J4.A7 J4.B7
DP: D3.3 J4.A6 J4.B6
EPD_3V3: C1-EP-DR.1 EPD_C5.2 J2.15 J2.16 L5.1 Q2.3
EPD_BUSY: J2.9 U1.P$AD12
EPD_CS: J2.12 U1.P$K2
EPD_DC: J2.11 U1.P$AD10
EPD_RST: J2.10 U1.P$AC11
GDR: J2.2 Q1.1 R2_EP_DR.2
GND: C1-EP-DR.2 C1.2 C2.2 C3.2 C4.2 C5.2 C6.2 C7.2 C8.2 C9.2 C10.2 C11.2 C12.2 C13.2 C14.2 C17.1 C18.1 C19.2 C20.2 C21.2 C22.2 C25.2 C27.2 C29.2 C30.2 C31.2 C32.2 C33.2 C34.2 C37.1 C38.1 C39.2 C42.2 C43.2 D3.2 D4.1 EPD_C1.2 EPD_C2.2 IC1.D2 IC2.B1 IC2.B3 IC3.8 IC3.9 IC9.C3 J1.3 J1.5 J2.8 J2.17 J2.MP1 J2.MP2 J4.A1_B12 J4.A12_B1 J4.SH1 J4.SH2 J4.SH3 J4.SH4 R1.1 R1_USB.1 R2_EP_DR.1 R2_USB.2 R9.1 R_TYPE_SEL.1 SJ1.1 SW1.1 SW2.1 SW3.1 TP_BAT_GND.TP TP_GND.TP U1.P$74 U1.P$75 U1.P$76 U1.P$77 U1.P$78 U1.P$79 U1.P$80 U1.P$81 U1.P$82 U1.P$83 U1.P$84 U1.P$85 U1.P$86 U1.P$87 U1.P$88 U1.P$89 U1.P$90 U1.P$F23 U2.1 U2.4 U2.6 U2.9 X1.2 X1.4
HAPTIC_EN: IC2.A1 U1.P$U1
IMU_INT1: IC3.5 U1.P$N1
IMU_INT2: IC3.6 U1.P$P2
LX1: IC9.B1 IC9.B2 IC9.B3 IC9.C1 IC9.C2 L7.1
LX2: IC9.D2 IC9.D3 L7.2
MOSI: J2.14 U1.P$B13
N$1: ANT1.1 C4.1 C22.1 L1.2
N$2: C9.1 U1.P$N24
N$3: C23.1 C24.1
N$4: C3.1 L1.1 U1.P$H23
N$5: IC9.D1 R4.2
N$7: IC1.D1 R9.2
N$8: IC9.E1 R2.2
N$9: C20.1 U1.P$AC5
N$10: C5.1 U1.P$C1
N$11: C32.1 IC2.A2
N$12: C2-EP-DR.2 D5.2 L5.2 Q1.3
N$13: C2-EP-DR.1 D2.1 D4.2
N$15: IC3.1 R1.2
N$16: R1_EP_DR.1 R_TYPE_SEL.2 SJ1.2
N$21: C18.2 U1.P$F2 X2.2
N$22: C17.2 U1.P$D2 X2.1
N$26: C10.1 C15.1 C16.1 L3.2 U1.P$B5 U1.P$E24
N$27: L2.1 U1.P$B3
N$28: C15.2 C16.2 U1.P$B7
N$29: L2.2 L3.1
N$30: C11.1 U1.P$D23
N$31: C2.1 U1.P$A23 X1.3
N$32: C1.1 U1.P$B24 X1.1
N$33: C13.1 U1.P$A18
N$36: EPD_C12.1 J2.24
N$37: EPD_C6.1 J2.18
N$38: EPD_C7.1 J2.19
N$39: EPD_C8.1 J2.20
N$40: EPD_C9.1 J2.21
N$41: EPD_C10.1 J2.22
N$42: J4.A5 R1_USB.2
N$44: EPD_C1.1 J2.5
N$45: EPD_C2.1 J2.4
N$47: J4.B5 R2_USB.1
OUT+: IC2.A3 TP_OP.TP
OUT-: IC2.C3 TP_ON.TP
P0.04: U1.P$J1
P0.09: U1.P$L24
P0.13: C30.1 R5.1 SW1.2 U1.P$AD8
P0.14: C31.1 R8.1 SW2.2 U1.P$AC9
P0.19: U1.P$AC15
P0.20: U1.P$AD16
P0.21: U1.P$AC17
P0.22: U1.P$AD18
P0.23: U1.P$AC19
P0.24: U1.P$AD20
P0.25: U1.P$AC21
P0.26: U1.P$G1
P0.27: U1.P$H2
P0.28: U1.P$B11
P0.29: U1.P$A10
P0.30: U1.P$B9
P0.31: U1.P$A8
P1.01: Q2.1 R_PWR_EPD.1 U1.P$Y23
P1.02: C29.1 R7.1 SW3.2 U1.P$W24
P1.03: U1.P$V23
P1.04: U1.P$U24
P1.05: U1.P$T23
P1.06: U1.P$R24
P1.07: U1.P$P23
P1.09: U1.P$R1
P1.10: U1.P$A20
P1.11: U1.P$B19
P1.12: U1.P$B17
P1.13: U1.P$A16
P1.14: U1.P$B15
P1.15: U1.P$A14
PMIC_INT: IC1.A1 U1.P$T2
PREVGH: D5.1 EPD_C5.1 EPD_C6.2 EPD_C7.2 EPD_C8.2 EPD_C9.2 EPD_C10.2 EPD_C11.2 EPD_C12.2
PREVGL: D2.2 EPD_C11.1 J2.23
RESE: J2.3 Q1.2 R1_EP_DR.2
RESET: J1.6 TP_RESET.TP U1.P$AC13
SCK: J2.13 U1.P$A12
SCL: IC1.B1 IC2.C1 IC3.12 R4.1 R17.2 TP_SCL.TP U1.P$M2 U2.7
SDA: IC1.C1 IC2.B2 IC3.2 R2.1 R18.2 TP_SDA.TP U1.P$L1 U2.8
SWDCLK: J1.4 TP_SWDCLK.TP U1.P$AA24
SWDIO: J1.2 TP_SWDIO.TP U1.P$AC24
SWO: TP_SWO.TP U1.P$AD22
VBAT: C27.1 C37.2 IC1.C2 TP_VBAT.TP U2.2 U2.3
VBUS: C21.1 C38.2 C42.1 C43.1 D3.5 IC1.A2 J4.A4_B9 J4.A9_B4 U1.P$AD2
VREG: C23.2 C24.2 C39.1 IC1.B2 IC9.A1 IC9.A2 IC9.A3 TP_VREG.TP

## Tracks (layer width: path | path; a pad name or v marks a point on that pad's centre or on a via)
3V3  (via drill 0.15 pad 0.25, 0.3)
  Top 0.102: v41.7,16.45 C8.1 | v41.9,17.42 U1.P$AD23 | IC2.C2 34.57,29.11 v34.5,29.19 | U1.P$A22 40.97,24.36 v40.97,24.47 | v39.21,16.77 39.12,16.68 39.07,16.62 C7.1 | U1.P$AD14 39.15,17.35 39.26,17.23 v39.26,17.21 | IC3.10 16.34,10.11 16.27,10.19 v16.27,10.24 | v35.58,24.02 35.65,23.96 U1.P$B1 | v35.54,18.85 C6.1 | TP_3V3.TP 41.53,10.2 41.53,10.86 v41.45,10.93 | v20.37,17.12 20.33,17.08 20.24,17.08 IC9.E3 | C12.1 41.06,28.66 41.32,28.41 v41.54,28.17 | v15.46,6.21 15.77,6.21 16.18,6.62 C19.1 16.18,7.43 16.18,8.18 IC3.7 | v32.07,28.99 32.19,29.11 C34.1 | v19.71,14.37 19.8,14.47 C25.1 | C33.1 21.46,16.19 21.83,16.18 21.82,16.19 v22.81,16.18 | v36.21,19.28 36.15,19.22 U1.P$Y2 | v36,19.57 35.89,19.46 35.89,19.42 U1.P$W1 | IC9.E2 20.17,16.43 v20.45,16.43 | v34.33,24.38 34.03,24.08 33.65,23.71 C14.1 | IC3.3 14.48,8.85 14.31,9.01 v14.31,9.12 | TP_3.3V.TP 18.52,25.67 19.02,25.17 19.06,25.17 v19.07,25.19 | J1.1 28.06,16.4 27.8,16.65 27.76,16.69 v27.76,16.78 | Q2.2 13.52,29.17 13.52,28.8 13.49,28.76 v13.49,28.73
  Top 0.127: v36.21,19.28 36.17,19.38 36.04,19.51 v36,19.57 | U1.P$W1 35.66,19.13 35.66,18.87 v35.54,18.85 | C6.1 34.39,18.87 33.38,18.87 30.96,21.28 30.96,28.27 31.6,28.9 31.98,28.9 v32.07,28.99 | v34.33,24.38 34.39,24.46 34.77,24.84 34.77,25.73 34.39,26.11 34.39,26.87 33.25,28.02 33.25,28.65 32.87,29.03 C34.1 | v39.26,17.21 39.22,17.09 39.22,16.84 v39.21,16.77 | v37.82,7.31 32.99,7.31 30.84,5.16 30.84,3.5 R7.2 | v17.37,9.6 17.63,9.35 17.63,9.09 R5.2 | IC9.E3 20.04,16.84 20.04,16.59 IC9.E2 | v20.45,16.43 20.55,16.46 20.8,16.46 21.06,16.2 C33.1 | v19.71,14.37 19.79,14.3 19.79,13.28 20.93,12.14 21.18,12.14 21.56,12.52 25.88,12.52 26.14,12.78 26.14,13.16 25.88,13.41 24.49,13.41 22.83,15.06 22.83,16.08 v22.81,16.18 | v13.49,28.73 13.44,28.78 11.15,28.78 10.77,29.16 10.52,29.16 R_PWR_EPD.2 10.39,29.16 9.5,29.16 6.83,26.49 6.83,25.48 7.85,24.46 8.36,24.46 8.48,24.33 8.48,10.62 7.72,9.85 2.77,9.85 2.64,9.73 2.64,7.31 3.02,6.93 | R8.2 17.37,8.2 16.23,8.2 IC3.7 | 3.02,6.93 3.53,6.93 3.78,6.68 3.78,6.55 R18.1 | 3.02,6.93 2.9,6.81 2.9,3.38 3.53,2.74 7.59,2.74 11.15,6.3 R17.1 11.28,6.3 11.4,6.17 15.34,6.17 v15.46,6.21
  Route2 0.127: v35.54,18.85 35.66,18.74 36.3,18.11 36.3,16.97 36.93,16.33 38.84,16.33 39.09,16.59 39.22,16.59 39.22,16.71 v39.21,16.77 | 16.87,10.11 v17.37,9.6 | 16.87,10.11 16.61,10.11 16.36,10.36 v16.27,10.24 | 16.87,10.11 16.87,10.36 19.41,12.9 19.41,13.92 19.79,14.3 v19.71,14.37
  Route15 0.127: 41,25.09 41,26.87 41.38,27.25 41.38,27.89 41.63,28.14 v41.54,28.17 | 41,25.09 41,24.59 v40.97,24.47 | 41,25.09 36.8,25.09 35.66,23.95 v35.58,24.02 | 41.12,16.08 39.85,16.08 39.34,16.59 39.22,16.59 39.09,16.71 v39.21,16.77 | 41.12,16.08 41.25,16.08 41.5,16.33 41.63,16.33 v41.7,16.45 | 41.12,16.08 41.12,11.38 41.5,11 v41.45,10.93 | v13.49,28.73 13.56,28.78 13.94,28.4 14.71,28.4 16.48,26.62 17.5,26.62 18.9,25.22 19.02,25.22 v19.07,25.19 19.15,25.22 19.66,24.71 19.66,23.32 20.42,22.55 20.42,20.52 20.29,20.4 20.29,20.27 20.42,20.14 20.42,17.22 v20.37,17.12 | v35.54,18.85 35.53,18.74 35.41,18.74 34.77,18.11 32.36,18.11 30.84,16.59 28.04,16.59 27.79,16.84 v27.76,16.78
  Bottom 0.127: v35.58,24.02 35.53,24.08 34.65,24.08 34.39,24.33 v34.33,24.38 | v34.5,29.19 34.39,29.16 32.23,29.16 32.11,29.03 v32.07,28.99 | v41.9,17.42 41.88,17.35 41.88,16.59 41.76,16.46 v41.7,16.45 | v37.82,7.31 41.38,10.87 v41.45,10.93 | v14.31,9.12 14.33,9.22 14.33,9.35 15.21,10.24 16.23,10.24 v16.27,10.24 | v27.76,16.78 27.66,16.71 25.5,16.71 25.37,16.59 23.22,16.59 22.83,16.2 v22.81,16.18
ALERT  (via drill 0.15 pad 0.25)
  Top 0.102: v41.55,20.79 41.55,21.08 41.9,21.43 U1.P$J24 | v23.72,7.66 23.7,7.64 23.54,7.64 23.32,7.42 U2.5
  Bottom 0.102: v41.55,20.79 41.55,20.43 40.77,19.65 40.53,19.65 40.06,19.18 40.06,16.42 33.7,10.06 26.12,10.06 v23.72,7.66
D+  (1 unrouted)
D-  (1 unrouted)
DN  (via drill 0.15 pad 0.25)
  Top 0.102: v25.7,22.95 27.05,24.3 27.05,26.08 25.02,28.12 | v17.74,12.88 17.51,12.64 17.51,11.42 19.69,9.24 D3.1 | 25.02,28.12 24.16,28.12 24.02,28.26 J4.A7 | J4.B7 25.02,28.12
  Bottom 0.102: v25.7,22.95 24.26,22.95 18.73,17.42 18.73,13.86 v17.74,12.88
DP  (via drill 0.15 pad 0.25)
  Top 0.102: J4.A6 24.52,29.85 23.52,29.85 J4.B6 23.52,28.35 23.99,27.88 24.7,27.88 26.75,25.83 26.75,25.01 25.07,23.33 v25.07,21.61 | v21.6,9.29 D3.3
  Bottom 0.102: v25.07,21.61 22.31,18.84 21.95,18.84 20.93,17.82 20.93,16.84 21.6,16.17 v21.6,9.29
EPD_3V3  (via drill 0.15 pad 0.25)
  Top 0.102: v16.22,23.69 16.31,23.69 17.39,22.6 L5.1 17.39,19.94 17.39,19.04 C1-EP-DR.1 | v14.16,31.06 13.7,31.52 Q2.3 | v14.75,20.71 14.75,19.62 14.15,19.02 14.15,17.88 13.95,17.67 EPD_C5.2 13.23,17.24 13.15,17.32 11.92,17.32 11.07,16.47 10.82,16.22 J2.15 10.43,16.07 J2.16
  Bottom 0.102: v14.16,31.06 16.22,29.01 v16.22,23.69 16.17,23.64 15.87,23.64 14.75,22.52 v14.75,20.71
EPD_BUSY  (via drill 0.15 pad 0.25)
  Top 0.102: v17.8,12.22 18.92,11.1 18.92,10.43 19.35,10 22.1,10 23.63,11.53 28.57,11.53 29.77,12.74 36.05,12.74 37.18,13.87 37.18,15.48 37.8,16.1 37.8,16.8 38.01,17.01 38.2,17.01 38.49,17.31 U1.P$AD12 | v11.54,18.13 11.54,18.56 11.02,19.09 10.88,19.22 J2.9
  Bottom 0.102: v17.8,12.22 17.46,11.89 16.9,11.89 12.33,16.46 12.33,17.34 v11.54,18.13
EPD_CS  (1 unrouted)
EPD_DC  (via drill 0.15 pad 0.25)
  Top 0.102: v25.64,21.19 24.94,21.19 24.76,21.38 24.76,21.42 22.22,23.95 20.08,23.95 19.36,24.68 16.41,24.68 14.6,22.87 13.57,22.87 13.07,22.37 v13.07,22.35 | v36.93,17.29 37.16,17.29 37.45,16.99 37.7,16.99 37.92,17.21 37.92,17.45 U1.P$AD10 | v11.01,17.73 10.94,17.8 10.94,18.22 10.7,18.22 J2.11
  Bottom 0.102: v25.64,21.19 29.58,21.19 32.63,18.15 36.07,18.15 v36.93,17.29 | v11.01,17.73 10.9,17.83 10.9,19.84 12,20.93 12,21.28 v13.07,22.35
EPD_RST  (via drill 0.15 pad 0.25)
  Top 0.102: v37.58,18.06 37.9,17.84 37.99,17.93 38.02,17.93 38.07,17.97 38.19,17.97 U1.P$AC11 | v14.35,19.66 14.09,19.4 14.09,19.3 13.83,19.04 13.83,18.23 13.35,17.76 11.46,17.76 11.18,18.04 11.18,18.31 11.03,18.45 10.76,18.72 J2.10
  Bottom 0.102: v37.58,18.06 37.58,19.38 37.21,19.75 36.95,19.75 36.2,20.5 36.2,21.33 34.65,22.88 33.62,22.88 32.39,24.12 22.64,24.12 19.98,21.46 18.07,21.46 16.27,19.66 v14.35,19.66
GDR  (via drill 0.15 pad 0.25)
  Top 0.102: v18.07,17.09 19,18.02 21.83,18.02 21.94,17.91 22.23,17.91 Q1.1 | v16.14,15.9 15.7,15.46 R2_EP_DR.2 15.57,14.65 15.32,14.9 15.32,16.98 14.39,17.91 14.39,18.96 14.75,19.3 14.73,19.3 15.06,19.62 15.06,20.81 14.35,21.52 12.2,21.52 11,22.72 J2.2
  Top 0.127: 15.72,14.55 R2_EP_DR.2 15.72,14.55
  Bottom 0.102: v18.07,17.09 16.87,15.9 v16.14,15.9
GND  (via drill 0.15 pad 0.25, 0.3)
  Top 0.102: v7.3,26.42 7.33,26.39 C38.1 | C6.2 34.51,19.94 34.51,20.23 34.56,20.27 v34.56,20.31 | C5.2 34.59,22.56 34.44,22.4 34.44,22.22 v34.71,21.95 | IC1.D2 12.91,25.49 v13.03,25.61 | D4.1 14.14,23.97 14.14,24.31 14.24,24.41 v14.31,24.41 | C31.2 28.41,6.48 28.41,6.75 28.36,6.8 v28.36,6.84 | SW2.1 24.71,4.22 25.04,4.22 25.09,4.27 v25.13,4.27 | C39.2 10.22,28.09 10.06,27.92 10.01,27.87 v9.9,27.87 | SJ1.1 21.26,25.09 v21.78,25.09 | SW3.1 35.33,4.59 35.33,4.97 v35.34,5 | C25.2 20.22,14.99 20,15.21 19.93,15.28 v19.88,15.28 | C1-EP-DR.2 18.41,18.65 18.18,18.42 v18.18,18.19 | v31.44,23.43 31.72,23.71 C14.2 | IC9.C3 v19.28,17.27 | C21.2 34.33,17.66 34.58,17.66 v34.71,17.54 | C8.2 40.82,16.3 40.82,15.94 41.71,15.05 v41.83,15.05 | v21.47,17.33 21.31,17.17 C33.2 | C1.2 44.57,18.81 44.57,18.6 v44.67,18.49 | v42.44,24.78 42.32,24.9 X1.4 | v35.33,31.79 35.44,31.69 35.51,31.61 C4.2 | C27.2 26.16,7.67 v26.38,7.89 | v41.37,29.08 41.33,29.04 41.19,29.04 41.06,29.17 C12.2 | C17.1 32.74,22.4 32.74,22.19 32.8,22.13 v32.8,22.08 | v22.35,6.87 22.39,6.83 U2.6 | J4.A1_B12 27.47,28.56 27.47,28.24 v27.47,28.18 | TP_BAT_GND.TP 41.15,3.76 40.69,4.22 40.65,4.26 v40.42,4.26 | C9.2 43.56,21.55 43.76,21.55 43.79,21.52 v43.87,21.52 | v7.79,23.63 J2.MP1 | J2.MP2 7.79,11.2 7.87,11.28 v7.87,11.34 | C19.2 15.67,7.14 15.67,6.88 15.58,6.79 v15.58,6.54 | SW1.1 13.53,4.22 13.89,4.22 13.93,4.26 v13.97,4.26 | C34.2 32.67,29.62 32.44,29.62 32.39,29.57 v32.35,29.57 | C7.2 38.31,16.13 38.08,15.9 v37.78,15.6 | v33.52,6.48 33.49,6.45 C29.2 | TP_GND.TP 15.62,17.99 15.62,17.33 15.64,17.32 v15.64,17.26 | C22.2 31.75,32.25 31.56,32.44 v31.45,32.44
  Top 0.102: J4.A12_B1 21.07,28.27 21.03,28.22 v21.03,28.18 | J2.17 10.7,15.22 10.92,15.22 v11.03,15.11 | v41.95,22.27 41.8,22.43 U1.P$F23 | IC3.9 16.22,9.47 v15.67,9.47 | IC2.B1 35.32,28.08 35.45,27.95 v35.45,27.89 | IC2.B3 33.73,28.34 33.74,28.33 v33.69,28.34 | v25.57,5.9 25.49,5.83 U2.1 | C13.2 39.63,27.02 39.77,27.16 v39.77,27.29 | C10.2 36.77,25.87 36.77,25.86 v36.77,25.9 | C3.2 44.42,22.51 44.42,22.74 v44.5,22.82 | v33.19,26.55 33.34,26.4 C32.2 | J1.3 28.33,17.39 28.61,17.11 v28.63,17.08 | C37.1 12.24,22.76 11.99,22.76 11.86,22.89 v11.86,22.98 | v17.07,5.77 17.26,5.57 C30.2 | v14.41,20.88 14.27,21.02 EPD_C1.2 | v38.8,28.75 38.92,28.62 C2.2 | IC3.8 16.44,8.85 16.65,8.85 16.71,8.78 v16.77,8.78 | U2.4 24.96,7.63 25,7.67 v25,7.7 | v11.5,19.08 11.58,19.01 11.77,18.81 EPD_C2.2 | v11.18,19.64 11.1,19.72 J2.8 | X1.2 40.87,26.88 40.87,27.33 v40.79,27.42 | v36.78,13.89 36.74,13.93 C42.2 | v24.13,7.46 23.97,7.3 U2.9 | v20.8,9.24 20.64,9.08 D3.2 | C20.2 35.78,16.35 35.5,16.35 35.44,16.29 v35.39,16.29 | v43.5,22.41 43.45,22.47 C11.2 | v36.18,14.44 36.54,14.8 C43.2 | C18.1 33.56,25.49 v33.56,25.66 | J1.5 28.46,18.53 v28.46,18.18
  Top 0.127: v12.55,8.08 13.06,8.08 R1.1 | R9.1 12.04,16.46 11.91,16.46 11.15,15.7 11.15,15.19 v11.03,15.11 | v14.83,16.08 14.83,14.81 15.6,14.05 R2_EP_DR.1 | v21.31,23.44 22.07,22.68 22.71,22.68 R1_USB.1 | v23.09,26.36 23.22,26.36 24.23,27.38 24.23,27.51 R2_USB.2 | R_TYPE_SEL.1 28.55,25.98 28.55,27.13 27.53,28.14 v27.47,28.18 | IC3.9 16.36,9.22 16.36,8.97 IC3.8 | v22.71,17.22 21.56,17.22 v21.47,17.33 | U1.P$74 38.96,21.03 39.47,21.54 U1.P$81
  Route2 0.127: v14.83,16.08 14.83,16.46 15.6,17.22 v15.64,17.26 | v21.31,23.44 21.31,24.59 21.69,24.97 v21.78,25.09 21.82,25.09 v23.09,26.36 | v22.71,17.22 21.82,17.22 21.69,17.09 21.18,17.09 20.68,17.6 19.66,17.6 19.41,17.35 v19.28,17.27
  Bottom 0.127: v12.55,8.08 13.94,8.08 15.47,6.55 v15.58,6.54 15.6,6.55 16.23,6.55 16.99,5.79 v17.07,5.77 | v34.71,21.95 34.65,21.92 32.99,21.92 32.87,22.05 v32.8,22.08 | v14.41,20.88 14.33,20.9 14.33,24.33 v14.31,24.41
  pour Route15 (isolate 0.102, rank 6): 540 corners
  pour Route2 (isolate 0.102, rank 6): 540 corners
HAPTIC_EN
  Top 0.102: IC2.A1 35.34,27.57 35.34,24.53 34.59,23.79 34.4,23.49 34.25,23.49 33.84,23.08 33.84,22.09 32.56,20.81 32.56,20.09 32.76,19.89 33.06,19.89 33.78,20.6 34.73,20.6 35.37,19.96 35.37,19.97 U1.P$U1
IMU_INT1  (via drill 0.15 pad 0.25)
  Top 0.102: v32.9,20.23 33.51,20.84 35.48,20.84 U1.P$N1 | IC3.5 15.32,8.42 15.32,8.71 15.53,8.92 v15.66,8.92
  Bottom 0.102: v32.9,20.23 31.18,21.95 24.76,21.95 20.66,17.85 20.66,16.68 20.75,16.6 20.75,16.13 20.7,16.09 20.63,16.09 20.36,15.81 20.36,13.19 16.04,8.87 15.71,8.87 v15.66,8.92
IMU_INT2  (via drill 0.15 pad 0.25)
  Top 0.102: v34.85,22.28 35.08,22.52 35.72,22.52 35.87,22.37 35.99,22.18 35.9,22.09 35.9,22.02 35.85,21.97 35.85,21.88 35.9,21.84 35.9,21.77 35.94,21.72 35.94,21.63 35.9,21.59 35.9,21.52 35.85,21.47 35.85,21.38 35.9,21.34 35.9,21.27 35.94,21.22 35.94,21.13 35.9,21.09 35.9,21.02 35.81,20.93 35.81,20.89 35.99,20.7 35.99,20.58 U1.P$P2 | v15.93,9.17 15.98,9.12 15.98,8.78 15.82,8.62 15.82,8.42 IC3.6
  Bottom 0.102: v34.85,22.28 33.91,22.28 32.48,23.71 28.04,23.71 26.61,22.28 23.89,22.28 19,17.39 19,12.23 v15.93,9.17
LX1  (via drill 0.15 pad 0.25)
  Top 0.102: v29.08,11.32 29.66,11.9 36.15,11.9 38.46,9.6 L7.1 | v25.76,12.99 23.89,12.99 21.76,15.12 20.76,15.12 20.56,15.31 20.36,15.31 20.16,15.51 19.77,15.7 19.57,15.7 19.28,15.99 IC9.C1 19.17,16.13 IC9.B1 18.88,16.24 IC9.B2 | IC9.B2 18.88,16.64 IC9.B3 | IC9.B2 IC9.C2
  Bottom 0.102: v25.76,12.99 27.41,12.99 v29.08,11.32
LX2  (via drill 0.15 pad 0.25)
  Top 0.102: v33.31,10.69 34.04,9.96 36.04,9.96 36.4,9.6 L7.2 | v21.56,17.67 20.42,17.67 19.96,17.21 IC9.D3 19.68,16.64 IC9.D2
  Bottom 0.102: v33.31,10.69 31.31,10.69 28.44,13.56 24.41,13.56 22.4,15.56 22.4,16.85 21.59,17.67 v21.56,17.67
MOSI  (via drill 0.15 pad 0.25)
  Top 0.102: v37.31,24.11 37.65,23.84 37.74,23.93 37.81,23.93 37.85,23.97 37.94,23.97 37.99,23.93 38.06,23.93 38.1,23.88 38.19,23.88 38.24,23.93 38.31,23.93 38.4,24.02 38.43,24.02 38.57,23.88 38.69,23.88 U1.P$B13 | J2.14 10.7,16.72 10.9,16.72 11.03,16.85 v11.03,16.92 | v13.44,22.24 15.21,22.24 v15.8,22.83
  Bottom 0.102: v37.31,24.11 36.76,24.66 22.1,24.66 21.34,23.9 18.4,23.9 17.33,22.83 v15.8,22.83 | v11.03,16.92 11.36,17.26 11.36,17.88 11.16,18.08 11.16,19.18 12.37,20.4 12.37,21.17 v13.44,22.24
N$1
  Top 0.102: L1.2 36.28,27.59 36.06,27.81 35.99,27.88 35.99,30.5 35.67,30.82 C4.1 35.65,30.91 36.02,30.91 36.61,31.5 ANT1.1 39.13,32.2 38.72,32.61 32.49,32.61 32.42,32.67 32.06,32.67 C22.1
N$2
  Top 0.102: C9.1 43.27,21.04 43.01,21.04 42.81,20.83 42.65,20.68 U1.P$N24
N$3
  Top 0.102: C23.1 17.28,14.79 17.28,14.99 17.08,15.19 C24.1
N$4
  Top 0.102: U1.P$H23 41.94,21.93 41.98,21.97 42.47,21.97 42.56,21.88 44.51,21.88 44.58,21.95 44.84,22.2 C3.1 45.02,22.53 45.27,22.79 45.27,25.42 42.87,27.82 41.55,27.82 41.47,27.9 40.94,27.96 39.87,27.96 39.85,27.95 39.35,27.68 39.23,27.56 37.41,27.56 36.97,28 36.7,28.27 L1.1
N$5  (via drill 0.15 pad 0.25)
  Top 0.102: IC9.D1 19.9,15.91 20.43,15.67 20.55,15.55 20.85,15.55 v20.97,15.43 | v21.3,13.4 21.41,13.29 21.41,13.03 R4.2
  Top 0.127: R4.2 21.44,13.03 21.41,13.03
  Bottom 0.102: v20.97,15.43 20.97,13.73 v21.3,13.4
N$7  (via drill 0.15 pad 0.25)
  Top 0.102: IC1.D1 12.66,24.88 12.53,24.74 v12.53,24.36 | v13.02,17.02 12.49,16.49 12.49,16.33 12.24,16.08 12.19,16.05 R9.2
  Top 0.127: R9.2 12.17,16.08 12.19,16.05
  Bottom 0.102: v12.53,24.36 12.53,23.77 13.74,22.55 13.74,21.69 12.9,20.85 12.9,17.14 v13.02,17.02
N$8  (via drill 0.15 pad 0.25)
  Top 0.102: v20.81,15.83 20.67,15.97 20.51,16.13 IC9.E1 | v20.68,14.75 20.69,13.92 R2.2
  Top 0.127: R2.2 20.68,13.92 20.69,13.92
  Bottom 0.102: v20.81,15.83 20.68,15.7 v20.68,14.75
N$9
  Top 0.102: C20.1 36.74,16.56 36.45,16.86 35.85,17.45 35.85,17.79 36.13,18.07 36.24,18.18 U1.P$AC5
N$10
  Top 0.102: U1.P$C1 35.43,23.18 35.06,23.55 34.75,23.55 34.5,23.13 34.27,22.89 C5.1
N$11
  Top 0.102: C32.1 34.93,27.48 IC2.A2
N$12  (via drill 0.15 pad 0.25)
  Top 0.102: Q1.3 20.09,18.72 19.8,19.01 18.94,19.87 18.69,20.12 L5.2 18.39,22.14 19.01,22.76 19.01,23.17 C2-EP-DR.2 18.85,23.56 18.64,23.78 18.64,24.05 v18.43,24.25 | D5.2 16.09,25.58 16.58,25.58 17,25.17 v17.16,25.17
  Bottom 0.102: v18.43,24.25 17.52,25.17 v17.16,25.17
N$13  (via drill 0.15 pad 0.25)
  Top 0.102: v20.52,23.38 20.48,23.35 C2-EP-DR.1 | D2.1 16.12,23.31 15.83,23.6 15.83,23.79 16.33,24.3 16.94,24.3 17.21,24.03 D4.2 18.24,23.77 v18.48,23.53
  Bottom 0.102: v20.52,23.38 20.37,23.53 v18.48,23.53
N$15
  Top 0.102: IC3.1 14.21,9.85 13.68,9.32 13.68,8.2 R1.2
  Top 0.127: R1.2 13.69,8.2 13.68,8.2
N$16  (via drill 0.15 pad 0.25)
  Top 0.102: SJ1.2 21.26,26.62 21.85,26.62 22.52,25.94 26.11,25.94 26.37,25.69 26.41,25.62 R1_EP_DR.1 26.45,25.27 v26.31,25.12 | v29.16,25.5 29.14,25.51 29.14,25.86 R_TYPE_SEL.2
  Top 0.127: R1_EP_DR.1 26.39,25.6 26.41,25.62 | 29.14,25.86 29.18,25.86 R_TYPE_SEL.2
  Bottom 0.102: v26.31,25.12 26.68,25.5 v29.16,25.5
N$21  (via drill 0.15 pad 0.25)
  Top 0.102: U1.P$F2 35.87,22.71 35.75,22.82 35.21,22.82 v34.86,23.18 | v33.87,24.33 33.98,24.43 33.98,24.82 34.24,25.07 C18.2 34.24,25.4 33.98,25.66 33.72,25.92 33.5,26 33.08,26 32.13,26.94 32.13,27.49 X2.2
  Bottom 0.102: v33.87,24.33 33.87,23.67 34.37,23.18 v34.86,23.18
N$22  (via drill 0.15 pad 0.25)
  Top 0.102: v36.04,23.27 36.04,23.03 U1.P$D2 | v34.25,23.78 34.09,23.78 33.5,23.19 33.25,22.93 C17.2 33.16,22.71 32.68,23.18 32.68,23.93 32.13,24.48 32.13,24.99 X2.1
  Bottom 0.102: v36.04,23.27 35.79,23.52 34.5,23.52 v34.25,23.78
N$26  (via drill 0.15 pad 0.25)
  Top 0.102: U1.P$B5 36.77,23.81 C10.1 36.93,25.07 37.19,25.33 37.22,25.33 37.96,26.07 38.22,26.33 C16.1 38.22,26.51 37.96,26.77 37.96,27.18 38.04,27.26 39.28,27.26 39.6,27.58 40.53,27.58 40.67,27.71 41.21,27.71 41.65,27.28 42.91,27.28 44.17,26.02 44.17,25.11 44.47,24.82 C15.1 | v44.09,27.68 44.13,27.68 44.37,27.91 L3.2 | U1.P$E24 42.43,22.4 42.66,22.15 42.66,22.16 42.7,22.11 43.68,22.11 43.97,22.41 43.97,22.88 44.63,23.54 C15.1 | v44.51,25.76 44.63,25.64 C15.1
  Bottom 0.102: v44.09,27.68 44.51,27.26 v44.51,25.76
N$27
  Top 0.102: U1.P$B3 36.4,23.89 35.76,24.53 35.76,29.47 35.01,30.22 35.01,31.96 35.15,32.1 L2.1
N$28  (via drill 0.15 pad 0.25)
  Top 0.102: C16.2 38.55,26.84 38.8,26.58 38.8,26.5 39.04,26.27 39.04,25.9 v38.92,25.79 38.55,25.79 37,24.24 37,23.99 37.15,23.84 37.24,23.84 U1.P$B7 | v42.57,24.36 42.81,24.61 C15.2
  Bottom 0.102: v38.92,25.79 39.64,25.07 41.3,25.07 42.01,24.36 v42.57,24.36
N$29
  Top 0.102: L2.2 39.6,33.1 40.54,32.16 40.54,30.51 43.98,27.07 44.4,27.07 L3.1
N$30
  Top 0.102: C11.1 U1.P$D23
N$31  (via drill 0.15 pad 0.25)
  Top 0.102: U1.P$A23 41.4,24.45 41.4,24.43 40.87,24.97 40.87,25.31 X1.3 40.61,25.52 40.21,25.52 40.17,25.56 v40.17,25.79 | v39.38,28.04 39.34,28.09 39.23,28.09 39.09,27.95 C2.1
  Bottom 0.102: v40.17,25.79 40.17,27.44 39.57,28.04 v39.38,28.04
N$32  (via drill 0.15 pad 0.25)
  Top 0.102: v44.2,19.43 44.06,19.29 C1.1 | v42.5,23.69 42.49,23.68 U1.P$B24 42.15,24.07 41.67,24.55 41.67,26.07 42,26.4 X1.1
  Bottom 0.102: v44.2,19.43 42.5,21.13 v42.5,23.69
N$33
  Top 0.102: C13.1 39.46,25.99 39.87,25.58 39.87,24.46 U1.P$A18
N$36
  Top 0.102: EPD_C12.1 4.32,9.35 4.74,9.35 4.91,9.18 9.08,9.18 9.23,9.32 9.23,9.97 10.43,11.16 J2.24
N$37  (via drill 0.15 pad 0.25)
  Top 0.102: v13.27,18.13 13.31,18.17 EPD_C6.1 | v13.12,16.63 12.56,16.07 12.56,15.92 11.9,15.27 11.92,15.27 11.35,14.72 J2.18
  Bottom 0.102: v13.12,16.63 13.41,16.92 13.41,18 v13.27,18.13
N$38
  Top 0.102: J2.19 10.15,14.22 9.78,14.22 8.77,13.21 EPD_C7.1
N$39
  Top 0.102: EPD_C8.1 12.96,12.22 12.54,12.22 11.77,12.99 11.49,12.99 11.28,13.2 11.28,13.51 11.07,13.72 10.7,13.72 J2.20
N$40
  Top 0.102: EPD_C9.1 12.56,11 12.27,11.29 12.27,11.79 10.83,13.22 J2.21
N$41
  Top 0.102: J2.22 10.85,12.72 11.64,11.94 11.64,11.57 12.23,10.97 12.23,10.41 12.4,10.23 13,10.23 13.22,10.46 13.22,11.56 13.58,11.92 13.58,12.52 12.68,13.43 EPD_C10.1
N$42
  Top 0.102: R1_USB.2 22.73,22.09 22.84,22.02 23.97,20.89 25.82,20.89 27.27,22.33 27.27,26.54 25.52,28.28 J4.A5
  Top 0.127: R1_USB.2 22.71,22.05 22.73,22.09
N$44
  Top 0.102: J2.5 10.7,21.22 10.93,21.22 11.56,20.59 11.56,19.47 11.77,19.26 12.77,19.26 12.9,19.13 13.61,19.13 13.77,19.3 13.77,19.55 14.27,20.05 14.27,20.25 14.03,20.49 13.65,20.49 13.42,20.72 13.42,20.99 13.39,21.02 EPD_C1.1
N$45
  Top 0.102: EPD_C2.1 12.05,20.62 10.95,21.72 10.7,21.72 J2.4
N$47
  Top 0.102: J4.B5 22.52,28.12 22.72,27.91 23.4,27.91 23.65,27.66 23.69,27.61 R2_USB.1
  Top 0.127: R2_USB.1 23.72,27.63 23.69,27.61
OUT+  (via drill 0.15 pad 0.25)
  Top 0.102: TP_OP.TP 38.41,13.1 38.11,13.83 37.84,14.1 v37.84,14.71 | IC2.A3 34.26,27.64 34.32,27.58 v34.32,27.51
  Bottom 0.102: v37.84,14.71 38.75,15.63 38.75,24.62 35.86,27.51 v34.32,27.51
OUT-
  Top 0.102: IC2.C3 34.07,29.06 32.24,30.89 19.44,30.89 19.15,30.61 19.15,29.7 17.3,27.84 16.59,27.84 15.71,26.96 13.78,26.96 13.11,27.24 TP_ON.TP
P0.13  (via drill 0.15 pad 0.25)
  Top 0.102: U1.P$AD8 37.55,17.58 v37.55,17.31 | SW1.2 10.78,4.64 11.09,4.95 11.09,5 11.23,5.13 15.81,5.13 16.67,4.27 17.09,4.27 C30.1 17.48,4.44 17.69,4.65 17.79,4.74 17.79,5.59 17.68,5.7 17.63,5.7 v17.56,5.76 | v18.67,6.89 18.51,7.05 18.51,8.66 18.26,8.91 18.24,8.95 R5.1
  Top 0.127: R5.1 18.26,8.97 18.24,8.95
  Bottom 0.102: v37.55,17.31 37.55,16.3 36.47,15.22 36.47,13.3 33.45,10.28 25.94,10.28 23.16,7.51 23.16,6.69 22.22,5.75 19.82,5.75 v18.67,6.89 18.35,6.89 18.09,6.63 18.09,6.31 18.02,6.24 17.73,6.24 17.47,5.97 17.47,5.82 17.52,5.76 v17.56,5.76
P0.14  (via drill 0.15 pad 0.25)
  Top 0.102: v32.26,11.6 31.92,11.6 27.9,7.59 27.9,5.81 28.19,5.51 C31.1 22.63,5.35 22.26,4.99 22.26,4.95 21.96,4.64 SW2.2 21.21,4.22 v21.13,4.15 | U1.P$AC9 37.73,18.34 37.74,18.34 37.35,18.34 v37.25,18.24 | v17.91,5.94 17.5,6.35 R8.1
  Top 0.127: 17.5,7.57 R8.1 17.5,7.57
  Bottom 0.102: v32.26,11.6 37.25,16.6 v37.25,18.24 | v17.91,5.94 19.7,4.15 v21.13,4.15
P1.01  (via drill 0.15 pad 0.25)
  Top 0.102: v41.88,20.93 41.88,20.57 41.99,20.46 41.99,20.43 41.9,20.34 41.9,20.27 41.85,20.22 41.85,20.13 41.9,20.09 41.9,20.02 41.94,19.97 41.94,19.88 41.9,19.84 41.9,19.77 41.85,19.72 41.85,19.63 41.9,19.59 41.9,19.52 41.99,19.43 41.99,19.39 41.85,19.26 41.85,19.13 U1.P$Y23 | v15.97,30.57 15.48,30.08 12.23,30.08 11.88,29.73 Q2.1 10.95,29.42 10.62,29.75 10.52,29.81 R_PWR_EPD.1
  Top 0.127: R_PWR_EPD.1 10.52,29.79 10.52,29.81
  Bottom 0.102: v41.88,20.93 41.88,21.05 40.73,22.2 40.54,22.2 40.1,22.64 40.1,24.19 33.34,30.96 16.35,30.96 v15.97,30.57
P1.02
  Top 0.102: R7.1 30.29,3.35 30.54,3.1 31.04,3.1 32.17,4.22 SW3.2 32.52,4.59 32.52,5.06 32.49,5.1 C29.1 32.65,5.73 32.95,5.43 37.55,5.43 40.36,8.24 40.36,12.74 43.16,15.54 43.16,19.13 42.96,19.32 42.68,19.32 42.53,19.18 U1.P$W24
  Top 0.127: 30.2,3.5 R7.1 30.2,3.5
PMIC_INT  (1 unrouted)
PREVGH  (via drill 0.15 pad 0.25)
  Top 0.102: EPD_C8.2 14.21,12.22 14.62,12.22 16.46,14.06 16.46,16.98 16.84,17.36 16.84,19.45 v15.44,20.85 | EPD_C12.2 3.36,9.14 3.66,8.84 9.5,8.84 9.77,9.12 9.77,9.53 EPD_C7.2 9.93,9.5 10.23,9.2 10.63,9.2 11.17,8.66 12.37,8.66 12.66,8.96 EPD_C11.2 12.99,9.38 13.28,9.68 13.72,10.12 EPD_C9.2 13.72,11.28 14.08,11.64 14.08,12.05 EPD_C8.2 | EPD_C8.2 14.08,12.4 14.08,12.81 12.93,13.97 12.38,13.97 12.09,14.27 EPD_C10.2 12.09,14.59 12.38,14.88 12.54,14.88 13.95,16.29 EPD_C5.1 14.09,16.73 14.3,16.73 14.37,16.79 v14.43,16.79 | D5.1 16.09,29.08 16.47,29.08 16.51,29.13 v16.55,29.13 | EPD_C6.2 13.31,19.76 13.31,20.01 v13.18,20.14
  Bottom 0.102: v16.55,29.13 16.55,23.53 16.41,23.39 15.95,23.39 15.44,22.87 v15.44,20.85 | v14.43,16.79 13.81,17.42 13.81,18.47 13.18,19.09 v13.18,20.14
PREVGL  (via drill 0.15 pad 0.25)
  Top 0.102: v19.72,20.76 19.62,20.86 D2.2 | J2.23 10.7,12.22 10.97,12.22 11.02,12.17 11.02,11.45 v11.76,10.71 11.76,10.6 11.37,10.2 11.37,9.68 11.66,9.38 EPD_C11.1
  Bottom 0.102: v19.72,20.76 19.72,18.93 18.48,17.69 18.48,15.17 17.46,14.15 17.46,12.72 17.62,12.55 17.93,12.55 18.08,12.4 18.08,12.09 16.71,10.71 v11.76,10.71
RESE  (via drill 0.15 pad 0.25)
  Top 0.102: R1_EP_DR.2 25.82,25.43 24.29,23.9 v24.29,23.84 | Q1.2 20.86,19.21 v19.37,20.7 | J2.3 10.7,22.22 10.95,22.22 12.49,20.69 12.49,20.6 12.66,20.43 13.33,20.43 13.6,20.15 v13.94,20.15
  Top 0.127: 25.88,25.6 R1_EP_DR.2 25.88,25.6
  Bottom 0.102: v24.29,23.84 22.85,23.84 20.21,21.19 19.66,21.19 19.37,20.9 v19.37,20.7 17.97,19.3 14.23,19.3 13.94,19.6 v13.94,20.15
RESET  (via drill 0.15 pad 0.25)  (1 unrouted)
  Top 0.102: TP_RESET.TP 17.61,31.44 17.61,30.64 17.67,30.58 v17.67,29.03 | v19,24.37 19.51,23.85 19.51,23.03 19.94,22.61 21.53,22.61 24.45,19.69 25.64,19.69 26.05,19.28 26.45,19.28 26.79,18.94 J1.6
  Bottom 0.102: v17.67,29.03 17.67,25.7 v19,24.37
SCK  (via drill 0.15 pad 0.25)
  Top 0.102: v38.37,24.42 38.41,24.38 38.44,24.38 U1.P$A12 | J2.13 10.15,17.22 9.78,17.22 9.51,17.5 9.51,20.46 9.78,20.73 9.78,21.12 v9.85,21.18
  Bottom 0.102: v38.37,24.42 37.87,24.93 32.74,24.93 30.53,27.14 20.51,27.14 19.09,28.56 19.09,28.63 17.86,29.86 15.78,29.86 14.25,31.39 14.05,31.39 9.85,27.18 v9.85,21.18
SCL  (via drill 0.15 pad 0.25)  (1 unrouted)
  Top 0.102: v11.85,24.02 11.71,24.16 11.71,24.72 IC1.B1 | IC2.C1 35.07,29.06 34.71,29.42 33.03,31.1 19.34,31.1 18.14,29.9 18.14,28.99 17.38,28.24 15.35,28.24 v14.63,27.52 | v9.68,6.98 10.04,6.98 10.49,6.53 10.54,6.48 R17.2 10.2,6.35 9.23,5.38 7.91,5.38 7.18,5.07 TP_SCL.TP | U2.7 22.67,6.33 22.31,6.33 21.88,6.76 v21.43,6.76 | v21.03,12.57 21.03,12.83 20.94,12.91 R4.1 | v15.24,9.46 15.32,9.55 IC3.12
  Top 0.127: R17.2 10.52,6.43 10.52,6.55 10.49,6.53 | R4.1 20.93,12.9 20.94,12.91
  Bottom 0.102: 11.77,9.33 10.67,10.43 10.67,22.84 v11.85,24.02 11.85,24.11 12.49,24.75 12.58,24.75 14.63,26.8 v14.63,27.52 | v9.68,6.98 11.77,9.08 11.77,9.33 | v21.43,6.76 19.78,8.41 19.78,8.55 | v21.03,12.57 19.78,11.31 19.78,8.55 | 11.77,9.33 11.84,9.33 12.54,8.64 14.41,8.64 14.63,8.86 14.63,9.29 14.87,9.52 15.18,9.52 v15.24,9.46 15.24,8.94 16.24,7.93 19.08,7.93 19.69,8.55 19.78,8.55
SDA  (via drill 0.15 pad 0.25)  (1 unrouted)
  Top 0.102: v34.9,21.19 U1.P$L1 | v12.09,24.79 12.26,24.96 IC1.C1 | v22.14,6.11 22.31,5.93 22.41,5.83 U2.8 | IC3.2 14.62,9.35 14.56,9.41 14.09,9.41 14.01,9.33 14.01,8.5 v14.28,8.23 14.28,7.85 13.96,7.53 13.59,7.53 13.52,7.45 11.78,7.45 11.72,7.51 11.72,7.68 10.67,8.73 v10.5,8.73 8.74,6.97 6.42,6.97 4.66,5.22 4.36,4.48 TP_SDA.TP 3.91,4.48 3.61,5.21 3.61,5.71 3.26,6.06 R18.2 | v21.97,13.75 21.83,13.89 21.31,13.89 R2.1
  Top 0.127: 21.31,13.89 21.31,13.92 R2.1 | 3.28,6.55 R18.2 3.28,6.55
  Bottom 0.102: v34.9,21.19 33.54,19.84 31.58,19.84 29.94,21.48 25.49,21.48 22.42,18.4 21.86,18.4 21.28,17.81 21.18,17.3 21.28,16.85 21.97,16.16 v21.97,13.75 22.71,13.01 22.71,6.66 22.46,6.41 22.44,6.41 v22.14,6.11 20.98,6.11 19.4,7.69 14.82,7.69 v14.28,8.23 | v12.09,24.79 10.34,23.04 10.34,8.89 v10.5,8.73
SWDCLK  (via drill 0.15 pad 0.25)
  Top 0.102: v28.87,14.15 28.32,14.7 28.32,15.25 27.85,15.73 27.77,15.73 27.56,15.93 27.56,16.5 26.93,17.14 J1.4 | U1.P$AA24 42.36,18.68 42.68,18.99 v42.87,18.99 | v35.21,11.13 33.3,11.13 32.89,10.72 32.89,10.62 32.33,10.05 TP_SWDCLK.TP 31.97,11.08 v32.02,11.12
  Bottom 0.102: v28.87,14.15 31.9,11.12 v32.02,11.12 | v42.87,18.99 42.41,18.99 40.77,17.36 40.77,16.69 v35.21,11.13
SWDIO  (via drill 0.15 pad 0.25)
  Top 0.102: v26.63,12.54 26.63,15.15 26.93,15.45 J1.2 | U1.P$AC24 42.15,17.78 42.24,17.69 42.24,17.29 41.78,16.83 40.17,16.83 39.06,15.72 38.4,15.72 37.48,14.8 37.48,13.78 36.02,12.32 29.65,12.32 28.4,11.08 v26.49,11.08 25.67,10.26 24.45,10.26 23.88,9.69 TP_SWDIO.TP
  Bottom 0.102: v26.49,11.08 26.63,11.21 v26.63,12.54
SWO  (via drill 0.15 pad 0.25)
  Top 0.102: v43.95,9.76 44.03,9.68 TP_SWO.TP | v41.08,17.14 41.08,17.61 U1.P$AD22
  Bottom 0.102: v43.95,9.76 41.08,12.63 v41.08,17.14
VBAT  (via drill 0.15 pad 0.25)
  Top 0.102: v17.22,12.19 17.22,10.87 19.23,8.86 19.23,7.87 TP_VBAT.TP 19.58,5.37 20.15,5.93 21.6,7.38 21.77,7.38 22.43,8.05 25.13,8.05 25.74,7.44 25.74,7.2 26,6.95 C27.1 26.02,6.86 25.74,6.86 25.72,6.83 U2.3 24.96,6.7 U2.2 | IC1.C2 12.54,25.77 12.7,25.93 13.11,25.93 13.32,25.72 13.32,24.71 v12.92,24.31 12.92,24.22 12.62,23.92 C37.2
  Bottom 0.102: v17.22,12.19 17.22,14.22 15.45,15.99 15.45,17 14.12,18.33 14.12,18.84 13.65,19.31 13.65,21.04 13.95,21.35 13.95,23.29 v12.92,24.31
VBUS
  Top 0.102: C38.2 10.7,25.86 11.07,25.49 IC1.A2 11.22,25.25 11.2,25.23 11.2,24.14 12.07,23.26 12.7,23.26 13.13,23.69 13.13,24.04 16.69,27.59 21.19,27.59 21.87,28.27 J4.A9_B4 21.87,29.84 22.12,30.09 26.42,30.09 26.67,29.84 J4.A4_B9 26.67,28.24 27.84,27.08 27.84,22.93 33.65,17.12 33.94,16.82 C21.1 34.37,16.5 34.66,16.2 35,15.86 35.53,15.86 35.87,15.53 | D3.5 20.84,11.4 21.46,12.03 28.09,12.03 29.3,13.24 34.66,13.24 35.36,13.93 C42.1 35.79,14.08 35.79,14.44 35.91,14.56 35.91,14.68 35.7,14.88 C43.1 35.87,15.42 35.87,15.53 | U1.P$AD2 36.43,17.4 36.82,17 37.06,17 37.4,16.66 37.4,16.03 37.09,15.72 36.07,15.72 35.87,15.53
VREG
  Top 0.102: IC1.B2 11.58,25.77 11.58,26.15 10.94,26.79 10.65,27.09 C39.1 10.22,27.09 9.93,26.79 8.44,26.79 7.83,26.19 7.83,25.58 9.78,23.64 10.79,23.64 11.43,22.99 11.43,22.91 12.57,21.78 14.94,21.78 17.08,19.63 17.08,19.09 C24.2 17.26,16.76 17.68,16.76 17.91,16.53 IC9.A2 | TP_VREG.TP 17.99,2.84 17.99,3.64 18.02,3.68 18.02,5.5 18.09,5.56 18.12,5.56 18.22,5.66 18.22,8.02 17.74,8.51 17.47,8.51 16.86,9.12 16.86,13.21 17.79,14.14 17.79,14.5 C23.2 17.89,14.81 18.14,15.07 18.14,15.39 18.48,15.72 IC9.A1 18.48,16.24 IC9.A2 | IC9.A2 18.48,16.64 IC9.A3